# Altium PCB Buck converter.PcbDoc (part 2 of 2)
Units mm, origin at the board's own origin, x right, y up, seen from the top; angles counter-clockwise.
Board outline 40 x 50 mm, 2 copper layers (Top Layer, Bottom Layer); 24 components, 14 nets, 77 pads, 274 vias.
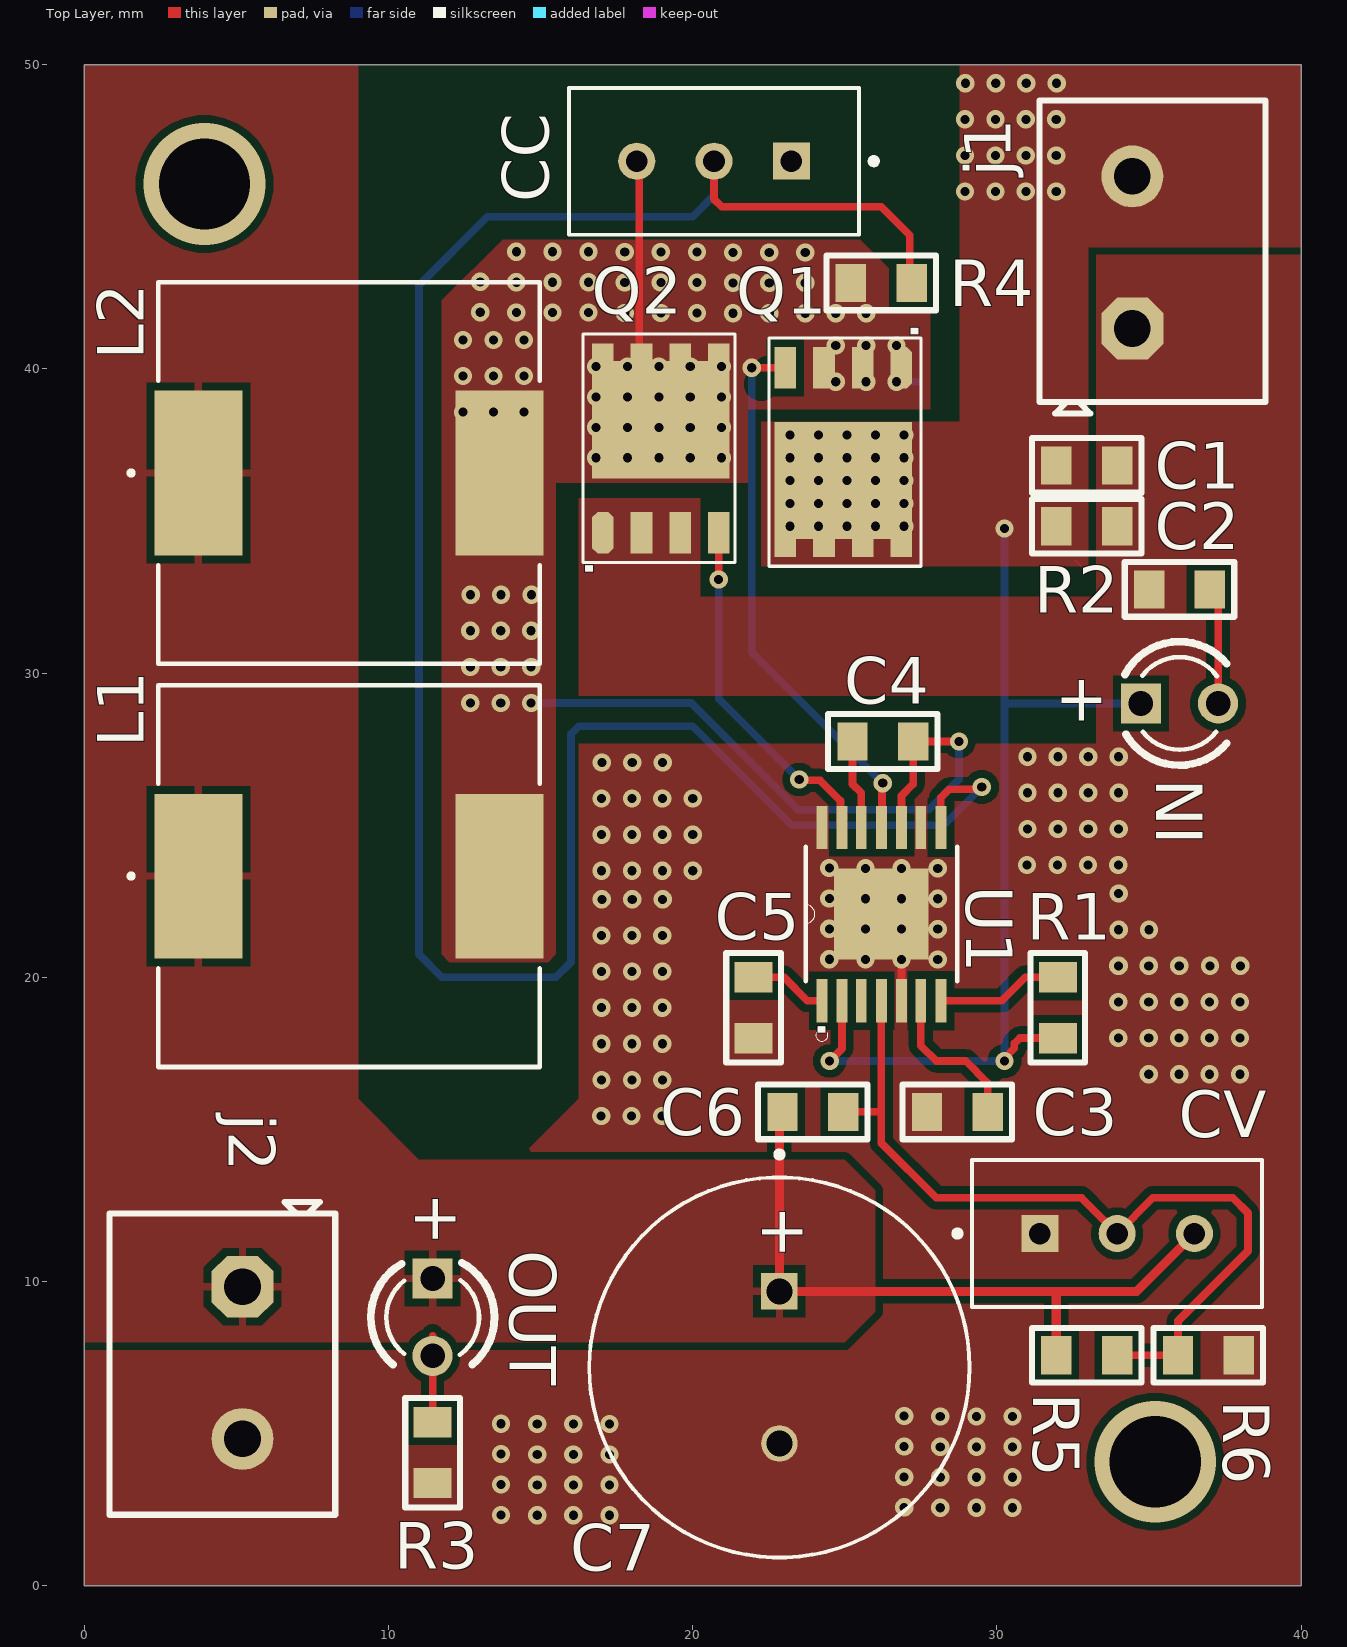
[diagram p0: Top Layer view]

## Polygon pours and split planes (outlines as drawn) (continued)
Vin on Bottom Layer "VIN_L02_P001" (solid, pour order 1): 22.45,38.325 28.2,38.325 28.2,50.075 39.45,50.075 39.45,44.825 38.7,44.075 32.7,44.075 32.7,33.575 22.45,33.575

## Silkscreen, mask and mechanical layers (free items; w line width, h text height)
Top Overlay:
  text "+" at 33.652,29.762 h1.52 r180
  text "+" at 12.212,11.173 h1.52 r90
  text "+" at 23.612,10.753 h1.52 r90
Bottom Overlay:
  region: 1729 vertices and 11 holes, not listed, extent 35.309,21.444 39.278,26.212
  text "IN+" at 38.446,48.471 h1.52 r90
  text "IN-" at 38.696,42.721 h1.52 r90
  text "OUT+" at 1.604,8.729 h1.52 r270
  text "OUT-" at 1.604,1.229 h1.52 r270

## Dimensions
40,50 to 0,50 on Mechanical 1
40,0 to 40,50 on Mechanical 1